# EAGLE board Trampoline_Lights_BASE (EAGLE 7.6.0)

Size 149.86 x 81.79 mm. Coordinates in mm from the lower left corner, seen from the top.
Copper layers (1*16): Top 0.035mm / dielectric 1.5mm / Bottom 0.035mm
Design rules "SparkFun-2-layer-STANDARD *": minimum track width 8mil, minimum drill 20mil, track to track 10mil, track to pad 8mil, pad to pad 8mil, via to via 10mil, smd to smd 8mil, copper to edge 8mil, drill to drill 8mil, minimum pad ring 10mil, minimum via ring 10mil, stop-mask expansion 4mil, vias tented up to drill 25mil, thermal gap 10mil
Net classes: 1 8_mil: width 0.203 mm; 2 10_mil: width 0.254 mm; 3 12_mil: width 0.305 mm; 4 15_mil: width 0.381 mm; 5 20_mil: width 0.508 mm; 6 25_mil: width 0.635 mm; 7 30_mil: width 0.762 mm

## Footprints (pad centres in the part's own frame; a part is rotated, then mirrored left to right if it is on the bottom)
BEEFCAKE_RELAY = hole 3.048: -22.86,12.7; 27.94,12.7; 27.94,-12.7; -22.86,-12.7
SIMON_JUMPS_LIGHT_BREAKOUT = hole 3.048: -8.89,17.78; 10.16,17.78; 10.16,-16.51; -8.89,-16.51
FLANGED_RED_ENCLOSURE-DIMENSION = hole 3.175: -10.93,-35.91; 11.07,-35.91; 62.07,-35.91; -61.93,-35.91; -10.93,34.09; 11.07,34.09; 62.07,34.09; -61.93,34.09

## Placement (x,y rotation side)
E$1  [BEEFCAKE_RELAY]  52.07,40.64 90 top
E$2  [BEEFCAKE_RELAY]  16.51,40.64 90 top
E$3  [BEEFCAKE_RELAY]  87.63,40.64 90 top
E$4  [SIMON_JUMPS_LIGHT_BREAKOUT]  128.27,57.15 90 top
E$5  [FLANGED_RED_ENCLOSURE-DIMENSION]  74.93,41.91 0 top

## Library data of the parts
E$1-E$4 = simon_jumps
E$5 = SparkFun-Boards